# Allegro board 21ic.brd
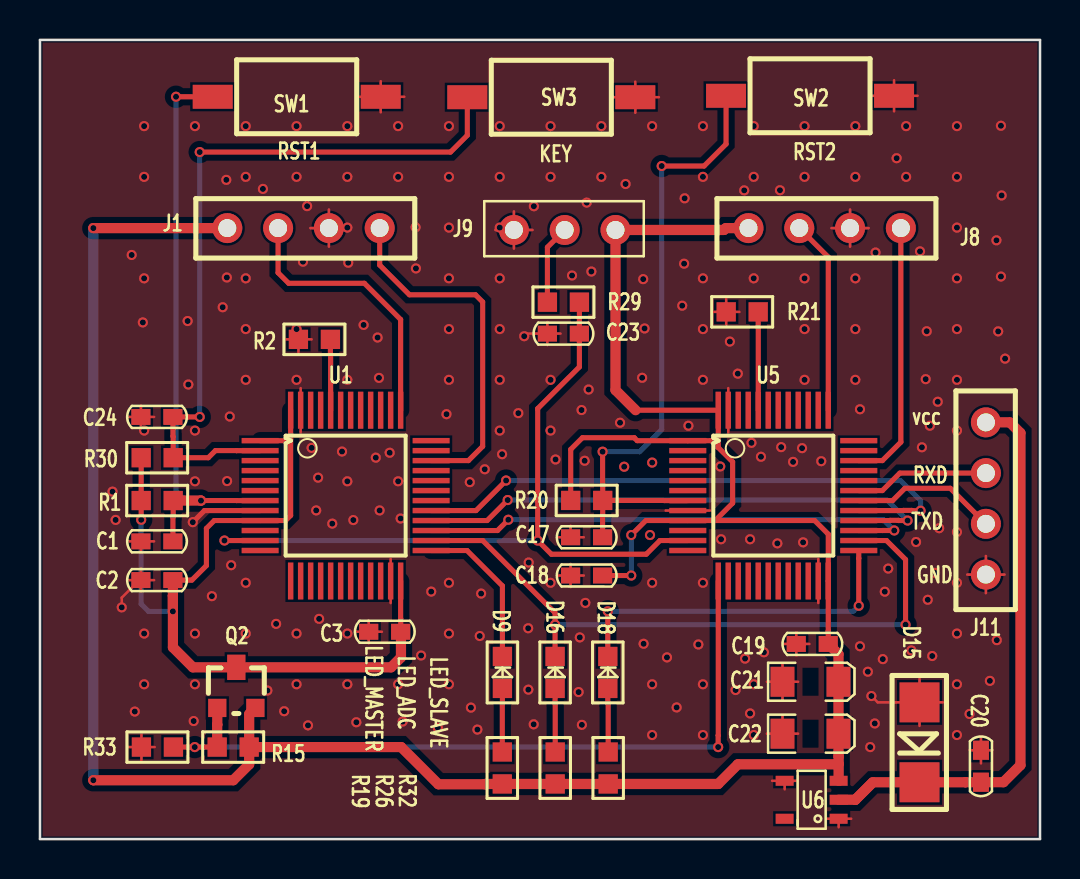
[diagram p0: board, top side]
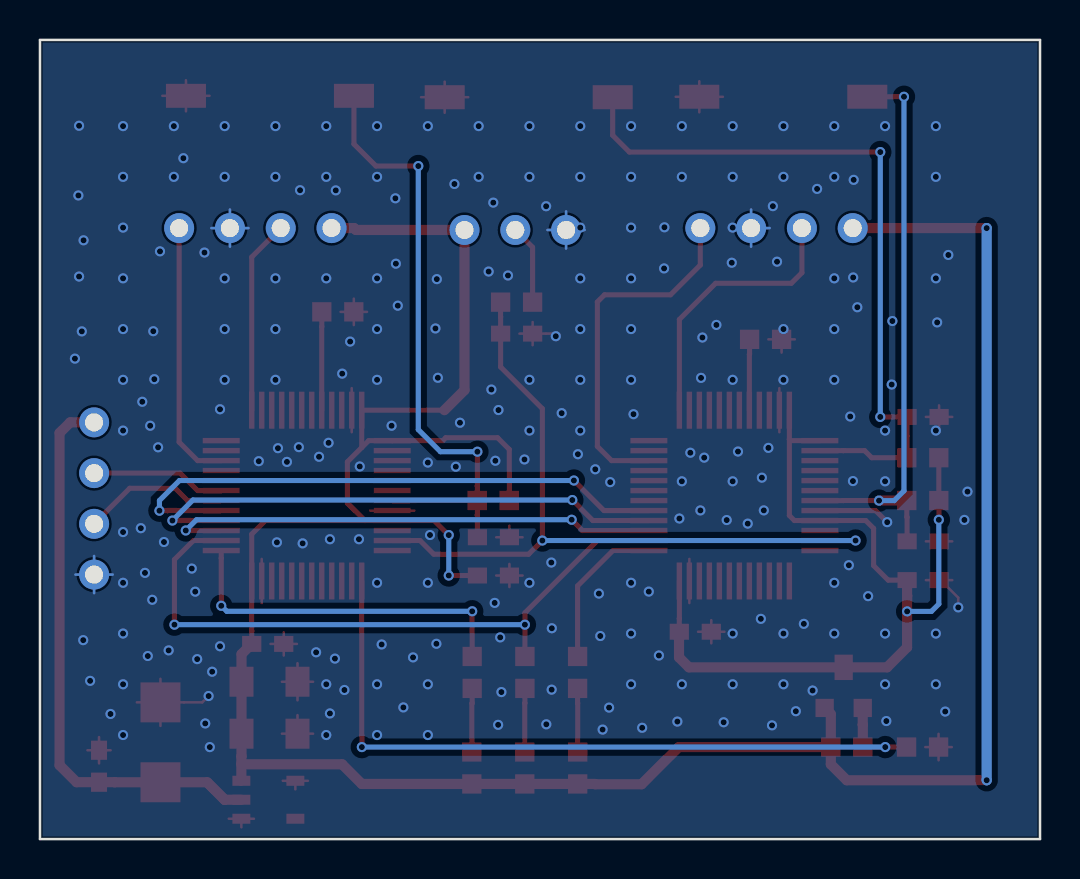
[diagram p1: board, bottom side, seen from below]

Outline 50 x 40 mm; copper layers: TOP, BOTTOM. Coordinates in mm from the lower left corner of the outline.
Outline path: 0,40 50,40 50,0 0,0 0,40

## Placement (name value [footprint] x y rotation side)
C1  0.1uF/16V  [C0603]  6.65 14.9 180 top
C2  0.1uF/16V  [C0603]  6.65 12.96 180 top
C3  0.1uF/16V  [C0603]  18.04 10.38 180 top
C17  0.1uF/16V  [C0603]  28.13 15.11 180 top
C18  0.1uF/16V  [C0603]  28.13 13.19 180 top
C19  0.1uF/16V  [C0603]  39.41 9.77 180 top
C20  10uF/16V  [C0603]  47.05 2.85 90 top
C21  22uF/16V  [C1206]  39.92 7.87 0 top
C22  10uF/16V  [C1206]  39.92 5.27 0 top
C23  0.1uF/16V  [C0603]  26.97 25.3 180 top
C24  0.1uF/16V  [C0603]  6.65 21.13 180 top
D9  LED  [LED_0603]  23.12 7.54 90 top
D15  P4SMA8.2A  [SMA]  43.98 6.84 270 top
D16  LED  [LED_0603]  25.76 7.54 90 top
D18  LED  [LED_0603]  28.39 7.54 90 top
J1  CON4  [CON_2_54_4P]  9.36 30.58 0 top
J8  CON4  [CON_2_54_4P]  35.42 30.58 0 top
J9  CON3  [CON_2_54_3P]  23.7 30.49 0 top
J11  CON4  [CON_2_54_4P]  47.3 20.86 270 top
Q2  SI2343  [SOT23]  9.82 7.55 0 top
R1  10K  [ER0603]  5.86 16.94 0 top
R2  100K  [ER0603]  13.72 25.01 0 top
R15  100K  [ER0603]  9.66 4.6 0 top
R19  1K  [ER0603]  23.12 3.56 270 top
R20  10K  [ER0603]  27.34 16.95 0 top
R21  100K  [ER0603]  35.11 26.39 0 top
R26  1K  [ER0603]  25.76 3.56 270 top
R29  1K/1%  [ER0603]  26.17 26.88 0 top
R30  10K  [ER0603]  5.86 19.09 0 top
R32  1K  [ER0603]  28.41 3.56 270 top
R33  1K  [ER0603]  5.87 4.6 180 top
SW1  SW KEY-SPST  [SW3X6]  17.04 37.16 180 top
SW2  SW KEY-SPST  [SW3X6]  42.7 37.21 180 top
SW3  SW KEY-SPST  [SW3X6]  29.77 37.13 180 top
U1  STM32F051C8T6  [CQFP50P920X920X127-49M]  11.01 19.94 0 top
U5  STM32F051C8T6  [CQFP50P920X920X127-49M]  32.39 19.94 0 top
U6  TLV70433DBVT  [SOT-23-5]  39.93 1.02 90 top

## Library data of the parts
C1-C3 C17-C24 = CAP NP
D9 D16 D18 = LED_0
D15 = DIODE_1
J1 J8 J11 = CON4
J9 = CON3
Q2 = MOSFET P_1
R1 R2 R15 R19-R21 R26 R29 R30 R32 R33 = R
SW1-SW3 = SW KEY-SPST
U1 U5 = STM32F030C8T6
U6 = TLV70433DBVT

## Footprints (pads in the part's own frame, mm; a bottom-side part is the same pattern mirrored in y, then rotated)
C0603
  rect 0.96x0.8 smd: 1(0,0) 2(1.6,0)
C1206
  rect 1.2x1.5 smd: 1(0,0) 2(-2.8,0)
CON_2_54_3P
  round 1.5 hole 0.9: 1(0,0) 2(2.54,0) 3(5.08,0)
CON_2_54_4P
  round 1.5 hole 0.9: 1(0,0) 2(2.54,0) 3(5.08,0) 4(7.62,0)
CQFP50P920X920X127-49M
  rect 1.85x0.27 smd: 1(0,0) 2(0,-0.5) 3(0,-1) 4(0,-1.5) 5(0,-2) 6(0,-2.5) 7(0,-3) 8(0,-3.5) 9(0,-4) 10(0,-4.5) 11(0,-5) 12(0,-5.5) 25(8.55,-5.5) 26(8.55,-5) 27(8.55,-4.5) 28(8.55,-4) 29(8.55,-3.5) 30(8.55,-3) 31(8.55,-2.5) 32(8.55,-2) 33(8.55,-1.5) 34(8.55,-1) 35(8.55,-0.5) 36(8.55,0)
  rect 0.27x1.85 smd: 13(1.525,-7.025) 14(2.025,-7.025) 15(2.525,-7.025) 16(3.025,-7.025) 17(3.525,-7.025) 18(4.025,-7.025) 19(4.525,-7.025) 20(5.025,-7.025) 21(5.525,-7.025) 22(6.025,-7.025) 23(6.525,-7.025) 24(7.025,-7.025) 37(7.025,1.525) 38(6.525,1.525) 39(6.025,1.525) 40(5.525,1.525) 41(5.025,1.525) 42(4.525,1.525) 43(4.025,1.525) 44(3.525,1.525) 45(3.025,1.525) 46(2.525,1.525) 47(2.025,1.525) 48(1.525,1.525)
ER0603
  rect 0.965x0.965 smd: 1(-0.8,0) 2(0.8,0)
LED_0603
  rect 0.965x0.965 smd: 1(0,0) 2(1.6,0)
SMA
  rect 2x2 smd: 1(0,0) 2(4,0)
SOT23
  rect 0.914x0.914 smd: 1(-0.953,-0.991) 2(0.953,-0.991)
  rect 0.914x1.27 smd: 3(0,1.041)
SOT-23-5
  rect 0.5x0.9 smd: 1(0,0) 2(0.95,0) 3(1.9,0) 4(1.9,2.7) 5(0,2.7)
SW3X6
  rect 2x1.2 smd: 1(0,0) 2(8.4,0)

## Nets
GND: C1.2 C2.2 C3.2 C17.2 C18.2 C19.2 C20.2 C21.2 C22.2 C23.2 C24.2 D15.1(A) J1.3 J8.3 J9.1 J11.4 R2.1 R21.1 R33.2 SW1.1 SW2.1 SW3.1 U1.8(VSSA) U1.23(VSS#23) U1.47(VSS#47) U5.8(VSSA) U5.23(VSS#23) U5.47(VSS#47) U6.1(GND) U6.4(NC/FB)
VCC: C20.1 D15.2(K) J11.1 U6.2(IN)
VCC_3.3V: C2.1 C3.1 Q2.3(SOURCE) R1.1 R30.1 U1.1(VDD#1) U1.9(VDDA) U1.24(VDD#24) U1.48(VDD#48)
VCC_3.3V_IN: C18.1 C19.1 C21.1 C22.1 J1.1 J8.1 J9.3 Q2.2(DRAIN) R15.2 R19.2 R20.1 R26.2 R32.2 U5.1(VDD#1) U5.9(VDDA) U5.24(VDD#24) U5.48(VDD#48) U6.3(VOUT)
BATTERY: C23.1 R29.2 U1.11(PA1/ADC_IN1) U5.11(PA1/ADC_IN1)
IO1: U1.29(PA8) U5.29(PA8)
IO2: U1.28(PB15) U5.28(PB15)
IO3: U1.27(PB14) U5.27(PB14)
KEY: C24.1 R30.2 SW3.2 U1.2(PC13)
LED_ADC_STATUS: D16.2(CATHODE) U1.26(PB13) U5.26(PB13)
LED_MASTER_STATUS: D9.2(CATHODE) U1.25(PB12)
LED_SLAVE_CPU_STATUS: D18.2(CATHODE) U5.25(PB12)
MASTER_PWR_EN: Q2.1(GATE) R15.1 R33.1 U5.13(PA3/USART2_RX)
MCU_RXD: J11.2 U5.31(PA10)
MCU_TXD: J11.3 U5.30(PA9)
RST: C1.1 R1.2 SW1.2 U1.7(NRST)
SWCLK: J8.2 U5.37(PA14)
SWCLK1: J1.2 U1.37(PA14)
SWDIO: J8.4 U5.34(PA13)
SWDIO1: J1.4 U1.34(PA13)
N00766: R2.2 U1.44(BOOT0)
N07435: D9.1(ANODE) R19.1
N27757: C17.1 R20.2 SW2.2 U5.7(NRST)
N27783: R21.2 U5.44(BOOT0)
N30063: D16.1(ANODE) R26.1
N32875: D18.1(ANODE) R32.1
N33306: J9.2 R29.1

Pads without a net: U1 3 4 5 6 10 12 13 14 15 16 17 18 19 20 21 22 30 31 32 33 35 36 38 39 40 41 42 43 45 46; U5 2 3 4 5 6 10 12 14 15 16 17 18 19 20 21 22 32 33 35 36 38 39 40 41 42 43 45 46; U6 5

## Via types
v1: diameter 0.508, hole 0.305, TOP to BOTTOM, 264 vias

## Routing (per net, layer and track width the routed paths; a pad name or vN(x,y) marks a point on that pad's centre or on a via; arc(x,y) is an arc through that point)
GND: length 102.7
  TOP w0.127: C21.2 37.9,7.87 ; C21.2 37.12,6.95 ; C21.2 37.12,8.8 ; C21.2 36.35,7.87 ; SW2.1 42.7,37.98 ; SW2.1 43.88,37.21 ; SW2.1 41.52,37.21 ; SW2.1 42.7,36.43 ; C24.2 5.7,21.13 ; C24.2 5.05,21.71 ; C24.2 4.39,21.13 ; C24.2 5.05,20.55 ; 39.93,0.59 U6.1 ; U6.1 39.3,1.02 ; U6.1 40.56,1.02 ; U6.4 37.86,2.92 ; U6.4 36.6,2.92 ; U6.4 37.23,2.49 ; C20.2 47.63,4.45 ; C20.2 47.05,3.79 ; C20.2 47.05,5.1 ; C20.2 46.47,4.45 ; C23.2 24.34,25.3 v1(24.21,25.17) ; C23.2 25.37,24.72 ; C23.2 26.03,25.3 ; C23.2 25.37,25.88 ; 25.87,15.11 C17.2 ; C17.2 27.19,15.11 ; C17.2 26.53,15.68 ; 17.04,36.38 SW1.1 ; SW1.1 15.86,37.16 ; SW1.1 18.21,37.16 ; SW1.1 17.04,37.93 ; 38.91,11.81 U5.23 38.91,14.02 ; J8.3 40.5,31.51 ; J8.3 41.43,30.58 ; J8.3 39.58,30.58 ; J8.3 40.5,29.65 ; 4.39,12.96 4.97,12.96 ; 4.97,12.96 4.09,12.08 v1(4.09,11.6) ; 4.97,12.96 C2.2 ; D15.1 45.15,6.84 ; D15.1 43.98,8.02 ; D15.1 41.89,6.84 v1(41.57,7.16) ; D15.1 43.98,5.66 ; 37.81,9.19 C19.2 ; C19.2 37.16,9.77 ; C19.2 37.81,10.34 ; C19.2 38.47,9.77 ; R2.1 12.92,25.67 ; R2.1 13.58,25.01 ; R2.1 12.92,24.35 ; R2.1 12.26,25.01 ; 5.05,12.38 C2.2 ; C2.2 5.7,12.96 ; C2.2 5.05,13.54 ; 36.35,5.27 C22.2 ; C22.2 37.9,5.27 ; C22.2 37.12,6.2 ; C18.2 26.53,13.77 ; C18.2 27.19,13.19 ; C18.2 26.53,12.61 ; C18.2 25.87,13.19 ; 33.49,16.44 U5.8 31.29,16.44 ; 5.07,3.94 R33.2 ; R33.2 5.07,5.26 ; R33.2 5.73,4.6 ; R33.2 4.41,4.6 ; 34.31,25.73 R21.1 ; R21.1 33.65,26.39 ; R21.1 34.97,26.39 ; R21.1 34.31,27.05 ; C1.2 5.7,14.9 ; C1.2 5.05,14.32 ; C1.2 4.39,14.9 ; 22.77,30.49 J9.1 ; J9.1 23.7,31.42 ; J9.1 23.7,29.56 ; J9.1 24.62,30.49 ; 14.44,29.65 J1.3 ; J1.3 13.52,30.58 ; J1.3 14.44,31.51 ; J1.3 15.37,30.58 ; 34.41,20.36 U5.47 34.41,22.57 ; 13.03,22.57 U1.47 13.03,20.36 ; 47.3,12.31 J11.4 ; J11.4 48.22,13.24 ; J11.4 46.37,13.24 ; J11.4 47.3,14.17 ; 28.59,37.13 SW3.1 ; SW3.1 30.94,37.13 ; SW3.1 29.77,37.91 ; SW3.1 29.77,36.36 ; 16.44,9.8 C3.2 ; C3.2 16.44,10.95 ; C3.2 15.78,10.38 ; C3.2 17.09,10.38 ; 17.53,11.81 U1.23 17.53,14.02
  TOP w0.254: U1.8 8.22,16.44 v1(7.64,15.86)
  BOTTOM w0.127: 13.52,30.58 J1.3 ; J1.3 15.37,30.58 ; J1.3 14.44,31.51 ; J1.3 14.44,29.65 ; J11.4 48.22,13.24 ; J11.4 47.3,12.31 ; J11.4 47.3,14.17 ; J11.4 46.37,13.24 ; J8.3 40.5,31.51 ; J8.3 41.43,30.58 ; J8.3 39.58,30.58 ; J8.3 40.5,29.65 ; 22.77,30.49 J9.1 ; J9.1 23.7,31.42 ; J9.1 23.7,29.56 ; J9.1 24.62,30.49
  vias: v1(3.63,17.39) v1(3.78,15.97) v1(4.58,29.24) v1(4.74,6.38) v1(5.14,25.86) v1(5.21,35.69) v1(5.21,33.15) v1(5.21,28.07) v1(5.21,20.45) v1(5.21,10.29) v1(5.21,7.75) v1(7.38,25.93) v1(7.42,22.75) v1(7.75,35.69) v1(7.75,20.45) v1(7.75,17.91) v1(7.75,10.29) v1(7.75,7.75) v1(7.68,5.91) v1(8.59,12.16) v1(9.13,26.62) v1(9.32,33) v1(9.34,28.11) v1(9.35,17.92) v1(9.49,21.15) v1(9.56,13.71) v1(10.29,35.69) v1(10.29,33.15) v1(10.29,28.07) v1(10.29,25.53) v1(10.29,22.99) v1(10.29,12.83) v1(10.29,10.29) v1(11.15,32.54) v1(11.37,7.43) v1(11.81,10.77) v1(12.21,6.4) v1(12.83,35.69) v1(12.83,33.15) v1(12.83,25.53) v1(12.83,22.99) v1(12.83,10.29) v1(12.83,7.75) v1(13.15,28.9) v1(13.36,31.68) v1(13.4,5.69) v1(13.58,19.58) v1(13.81,16.45) v1(13.91,18.09) v1(13.96,11.02) v1(14.61,15.79) v1(15.1,19.4) v1(15.37,35.69) v1(15.37,33.15) v1(15.37,30.61) v1(15.41,28.85) v1(15.37,22.99) v1(15.37,17.91) v1(15.37,10.29) v1(15.37,7.75) v1(15.67,15.97) v1(15.82,5.85) v1(16.18,25.74) v1(16.79,19.09) v1(16.88,25.11) v1(16.95,23.08) v1(16.98,16.45) v1(17.48,19.34) v1(17.91,35.69) v1(17.91,33.15) v1(17.91,17.91) v1(17.91,7.75) v1(18.03,16.05) v1(18.13,5.88) v1(18.78,30.62) v1(18.8,28.56) v1(19.06,9.19) v1(19.56,12.39) v1(19.89,5.57) v1(20.32,21.27) v1(20.45,35.69) v1(20.45,33.15) v1(20.45,30.61) v1(20.45,28.07) v1(20.45,25.53) v1(20.45,22.99) v1(20.45,12.83) v1(20.45,10.29) v1(20.45,7.75) v1(21.49,17.87) v1(21.55,6.58) v1(21.87,5.48) v1(21.99,10.16) v1(22.06,12.29) v1(22.24,18.51) v1(22.99,35.69) v1(22.99,33.15) v1(22.99,30.61) v1(22.99,28.07) v1(22.99,25.53) v1(22.99,22.99) v1(22.99,20.45) v1(23.1,19.26) v1(23.92,21.32) v1(24.43,13.84) v1(24.41,10.55) v1(24.42,7.48) v1(24.69,31.68) v1(24.68,5.74) v1(25.53,35.69) v1(25.53,33.15) v1(25.53,22.99) v1(25.53,20.45) v1(25.53,12.83) v1(25.78,19) v1(26.6,28.21) v1(26.93,7.36) v1(26.99,10.09) v1(27.08,21.47) v1(27.09,5.72) v1(27.23,18.94) v1(27.34,31.86) v1(27.27,11.82) v1(27.43,22.5) v1(27.57,28.41) v1(28.07,35.69) v1(28.07,33.15) v1(29,20.84) v1(29.21,18.64) v1(29.28,32.79) v1(30.11,23.09) v1(30.16,28.03) v1(30.23,25.56) v1(30.18,9.77) v1(30.5,15.22) v1(30.61,35.69) v1(30.61,18.84) v1(30.61,12.83) v1(30.61,7.75) v1(30.61,5.21) v1(31.35,9.09) v1(31.83,6.59) v1(32.11,26.7) v1(32.23,32.07) v1(32.21,28.8) v1(32.42,20.69) v1(32.92,9.74) v1(33.15,35.69) v1(33.15,33.15) v1(33.15,28.07) v1(33.15,25.53) v1(33.15,22.99) v1(33.15,12.83) v1(33.15,7.75) v1(33.15,5.21) v1(34.01,18.65) v1(34.05,15.01) v1(34.49,24.9) v1(34.78,7.46) v1(34.89,23.3) v1(35.21,32.47) v1(35.25,9.03) v1(35.5,15.01) v1(35.5,6.29) v1(35.57,19.83) v1(35.69,35.69) v1(35.69,33.15) v1(35.69,28.07) v1(35.69,7.75) v1(35.69,5.21) v1(36.05,19.13) v1(36.19,9.35) v1(36.87,14.8) v1(37,32.48) v1(37.06,19.62) v1(37.65,18.88) v1(38.1,19.57) v1(38.23,35.69) v1(38.23,33.15) v1(38.23,28.07) v1(38.23,25.53) v1(38.23,22.99) v1(38.15,14.85) v1(39.06,18.91) v1(40.77,35.69) v1(40.77,33.15) v1(40.77,28.07) v1(40.77,25.53) v1(40.77,22.99) v1(41,21.51) v1(41,9.65) v1(41.39,8.38) v1(41.51,4.6) v1(41.74,5.79) v1(41.78,29.36) v1(42.14,9.01) v1(42.24,12.38) v1(42.41,13.54) v1(42.83,34.08) v1(43.31,35.69) v1(43.31,33.15) v1(43.57,9.44) v1(43.8,14.87) v1(44,29.42) v1(44.1,19.61) v1(44.34,25.42) v1(44.28,23.02) v1(44.39,11.98) v1(44.49,20.69) v1(44.61,9.16) v1(44.75,13.32) v1(44.89,21.89) v1(44.96,15.56) v1(45.85,35.69) v1(45.85,33.15) v1(45.85,30.61) v1(45.85,28.07) v1(45.85,25.53) v1(45.85,22.99) v1(45.85,20.45) v1(45.85,15.37) v1(45.85,12.83) v1(45.85,10.29) v1(45.85,7.75) v1(45.85,5.21) v1(46.48,6.26) v1(47.49,7.92) v1(47.82,29.97) v1(47.84,9.96) v1(47.91,25.41) v1(48.05,35.7) v1(48.05,28.16) v1(48.08,32.22) v1(48.25,24.05)
VCC: length 29.5
  TOP w0.508: 40.76,1.97 U6.2 ; 40.76,1.97 41.64,2.84 D15.2 46.26,2.84 46.27,2.85 C20.1 48.17,2.85 49.02,3.7 49.02,20.33 48.49,20.86 J11.1 ; 40.76,1.97 40.77,1.97 41.57,2.77
VCC_3.3V: length 44.2
  TOP w0.254: C2.1 7.59,12.96 8.32,13.69 8.32,15.55 8.71,15.94 U1.9 12.28,15.94 12.53,16.2 12.53,20.01 ; U1.48 12.53,20.01 ; 12.53,20.01 12.46,19.94 U1.1 ; U1.24 18.03,11.03 18.04,11.03 C3.1 ; R30.1 R1.1 v1(5.06,15.98)
  TOP w0.508: 6.65,12.18 6.65,9.6 7.65,8.6 Q2.3 17.55,8.6 18.05,9.09 18.05,10.36 C3.1 ; 6.65,12.18 C2.1 ; 6.65,12.18 6.64,12.18 v1(6.64,11.4)
  BOTTOM w0.254: v1(5.06,15.98) 5.06,11.76 5.43,11.4 v1(6.64,11.4)
VCC_3.3V_IN: length 139.3
  TOP w0.254: v1(29.56,15.22) 30.29,15.94 U5.9 33.76,15.94 ; 33.76,15.94 38.73,15.94 39.41,15.26 U5.24 39.41,10.42 39.41,10.42 C19.1 ; 33.76,15.94 34.63,16.82 34.63,18.88 33.91,19.6 ; C18.1 v1(29.56,13.19) ; 33.91,19.6 33.57,19.94 U5.1 29.86,19.94 29.71,20.09 27.12,20.09 26.54,19.5 R20.1 ; 33.91,19.6 U5.48 29.78,21.47
  TOP w0.508: U6.3 39.93,3.76 ; 39.93,3.76 39.92,3.74 34.89,3.74 33.91,2.76 R32.2 R26.2 R19.2 22.25,2.76 22.24,2.74 19.92,2.74 18.06,4.6 R15.2 ; 39.93,3.76 39.93,4.14 39.92,4.14 C22.1 C21.1 39.92,9.26 C19.1 ; J1.1 v1(2.67,30.58) ; R15.2 10.46,6.25 Q2.2 ; R15.2 10.46,3.74 9.66,2.94 v1(2.67,2.94) ; J8.1 34.29,30.58 34.2,30.49 J9.3 28.78,22.47 29.78,21.47
  BOTTOM w0.254: v1(29.56,13.19) v1(29.56,15.22)
  BOTTOM w0.508: v1(2.67,30.58) v1(2.67,2.94)
BATTERY: length 38.3
  TOP w0.254: U1.11 v1(9.22,14.94) ; R29.2 26.97,26.14 26.97,26.14 C23.1 26.97,23.63 24.88,21.55 v1(24.88,14.94) 25.57,14.26 30.31,14.26 31,14.94 U5.11
  BOTTOM w0.254: v1(9.22,14.94) v1(24.88,14.94)
IO1: length 29.1
  TOP w0.254: v1(44.03,16.44) 43.61,16.44 43.59,16.45 43.17,16.45 43.16,16.44 U5.29 ; v1(23.31,17.95) 21.8,16.44 U1.29
  BOTTOM w0.254: v1(23.31,17.95) 43.03,17.95 44.03,16.94 v1(44.03,16.44)
IO2: length 27.1
  TOP w0.254: U5.28 42.12,15.94 42.49,15.94 42.5,15.95 42.92,15.95 42.93,15.94 v1(43.38,15.94) ; U1.28 22.36,15.94 v1(23.38,16.97)
  BOTTOM w0.254: v1(23.38,16.97) 42.35,16.97 v1(43.38,15.94)
IO3: length 25.4
  TOP w0.254: v1(42.71,15.45) 42.12,15.45 42.12,15.44 U5.27 ; U1.27 22.88,15.44 v1(23.42,15.98)
  BOTTOM w0.254: v1(23.42,15.98) 42.17,15.98 v1(42.71,15.45)
KEY: length 36.8
  TOP w0.254: v1(7.99,34.39) 20.53,34.39 21.37,35.23 SW3.2 ; U1.2 9.83,19.44 9.83,19.44 8.77,19.44 8.42,19.09 R30.2 6.66,20.15 6.65,20.16 C24.1 7.38,21.13 v1(7.99,21.13)
  BOTTOM w0.254: v1(7.99,34.39) v1(7.99,21.13)
LED_ADC_STATUS: length 33.4
  TOP w0.254: v1(43.28,10.73) 43.28,13.99 42.32,14.94 U5.26 ; U1.26 22.13,14.94 25.76,11.32 v1(25.76,10.73) D16.2
  BOTTOM w0.254: v1(25.76,10.73) v1(43.28,10.73)
LED_MASTER_STATUS: length 7.8
  TOP w0.254: U1.25 21.35,14.44 23.12,12.67 D9.2
LED_SLAVE_CPU_STATUS: length 17.7
  TOP w0.254: D18.2 v1(28.39,11.4) ; v1(40.94,11.68) 40.94,14.05 40.94,14.05 U5.25
  BOTTOM w0.254: v1(40.94,11.68) 40.66,11.4 v1(28.39,11.4)
MASTER_PWR_EN: length 38.6
  TOP w0.254: R15.1 v1(7.74,4.6) R33.1 ; U5.13 33.91,5.19 33.91,5.18 v1(33.91,4.6)
  TOP w0.508: R15.1 8.86,5.72 8.86,5.73 Q2.1
  BOTTOM w0.254: v1(7.74,4.6) v1(33.91,4.6)
MCU_RXD: length 6.7
  TOP w0.254: U5.31 42.12,17.44 42.99,18.32 J11.2
MCU_TXD: length 7.3
  TOP w0.254: U5.30 42.63,16.94 43.25,17.56 45.52,17.56 J11.3
RST: length 29.4
  TOP w0.254: C1.1 6.65,16.12 6.66,16.13 R1.2 ; U1.7 9.83,16.94 9.83,16.94 8.05,16.94 ; SW1.2 v1(6.8,37.16)
  TOP w0.508: v1(8.05,16.94) 8.05,16.94 R1.2
  BOTTOM w0.254: v1(6.8,37.16) 6.8,17.43 7.29,16.94 v1(8.05,16.94)
SWCLK: length 9.7
  TOP w0.254: J8.2 39.41,29.13 U5.37
SWCLK1: length 13.9
  TOP w0.254: U1.37 18.03,26.01 16.22,27.82 12.43,27.82 11.9,28.35 J1.2
SWDIO: length 13.2
  TOP w0.254: U5.34 42.12,18.94 43.04,19.87 J8.4
SWDIO1: length 17.9
  TOP w0.254: J1.4 16.98,28.73 18.47,27.24 21.77,27.24 22.13,26.88 22.13,19.66 21.42,18.94 U1.34
N00766: length 3.6
  TOP w0.254: R2.2 14.52,24.28 14.53,24.26 U1.44
N07435: length 3.3
  TOP w0.254: 23.12,4.24 R19.1 23.12,6.8 23.12,6.8 D9.1
N27757: length 31.2
  TOP w0.254: SW2.2 34.3,34.79 33.2,33.69 v1(31.09,33.69) ; U5.7 31.21,16.94 31.2,16.95 R20.2 ; R20.2 28.14,17.69 28.13,17.69 v1(28.13,19.39) ; R20.2 28.14,16.21 28.13,16.21 C17.1
  BOTTOM w0.254: v1(28.13,19.39) 29.98,19.39 31.09,20.5 v1(31.09,33.69)
N27783: length 4.9
  TOP w0.254: R21.2 35.91,25.65 35.91,25.65 U5.44
N30063: length 3.2
  TOP w0.254: D16.1 25.76,6.8 25.76,6.8 R26.1 25.76,4.34
N32875: length 3.2
  TOP w0.254: R32.1 28.41,6.78 28.39,6.8 D18.1
N33306: length 4
  TOP w0.254: R29.1 25.37,29.62 J9.2

## Copper pours and planes (outline as drawn; the poured copper is in the pictures)
GND on TOP: 0.13,0.13 0.13,39.87 49.87,39.87 49.87,0.13 ; 1 cut-out
GND on BOTTOM: 0.13,0.13 0.13,39.87 49.87,39.87 49.87,0.13 ; 2 cut-outs

## Text on the board
Ref Des/Silkscreen Top: RST1 | KEY | RST2 | TXD | vcc | RXD | GND | LED_MASTER | LED_ADC | LED_SLAVE
NCLEGEND-1-2: FIGURE | SIZE | 12.0 | 35.429 | 35.433 | DRILL CHART: TOP to BOTTOM | ALL UNITS ARE IN MILS | PLATED | QTY | 264 | 12 | 3
